# EAGLE board LedShield2b (EAGLE 5.06)
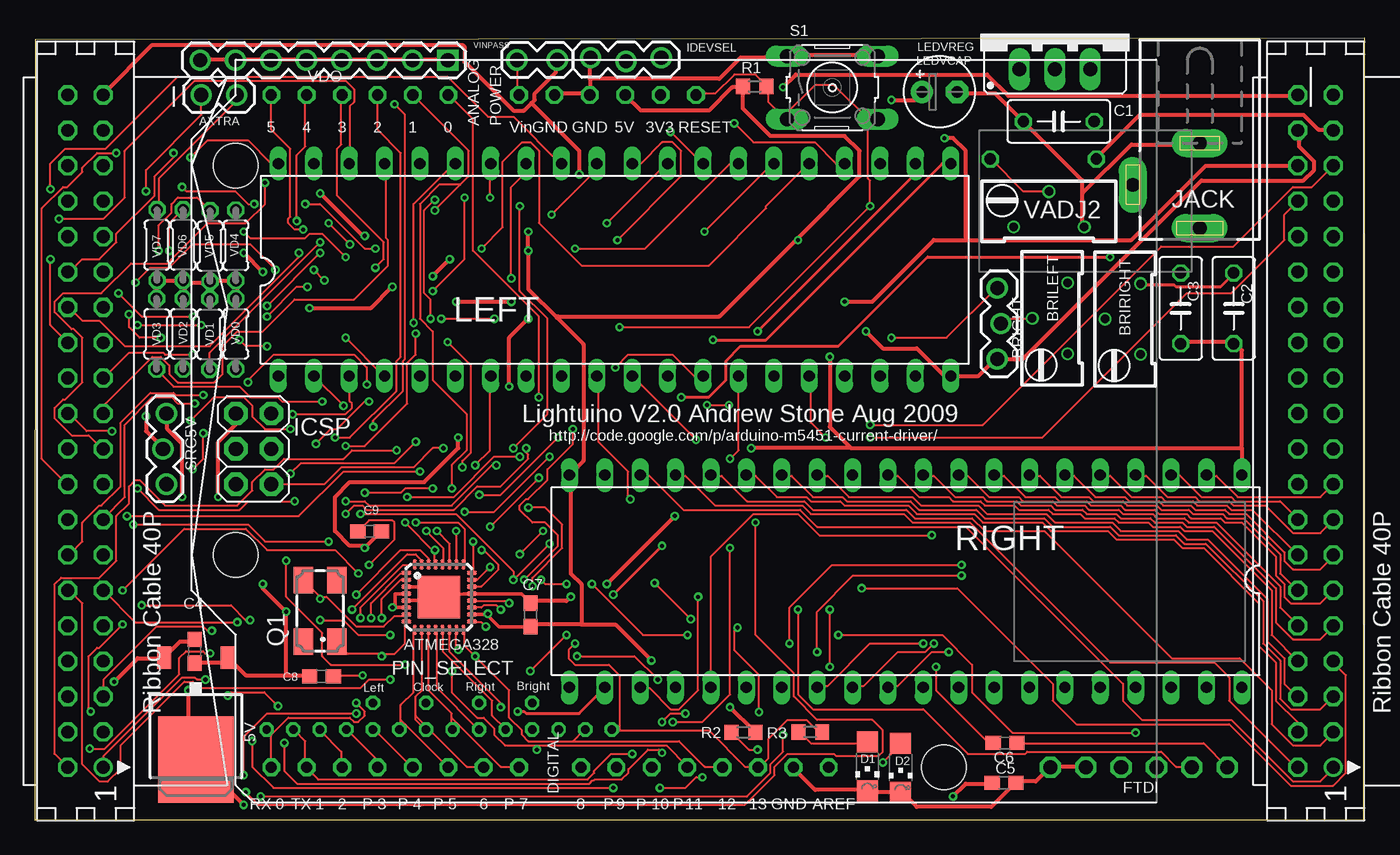
[diagram p0: board, top side]
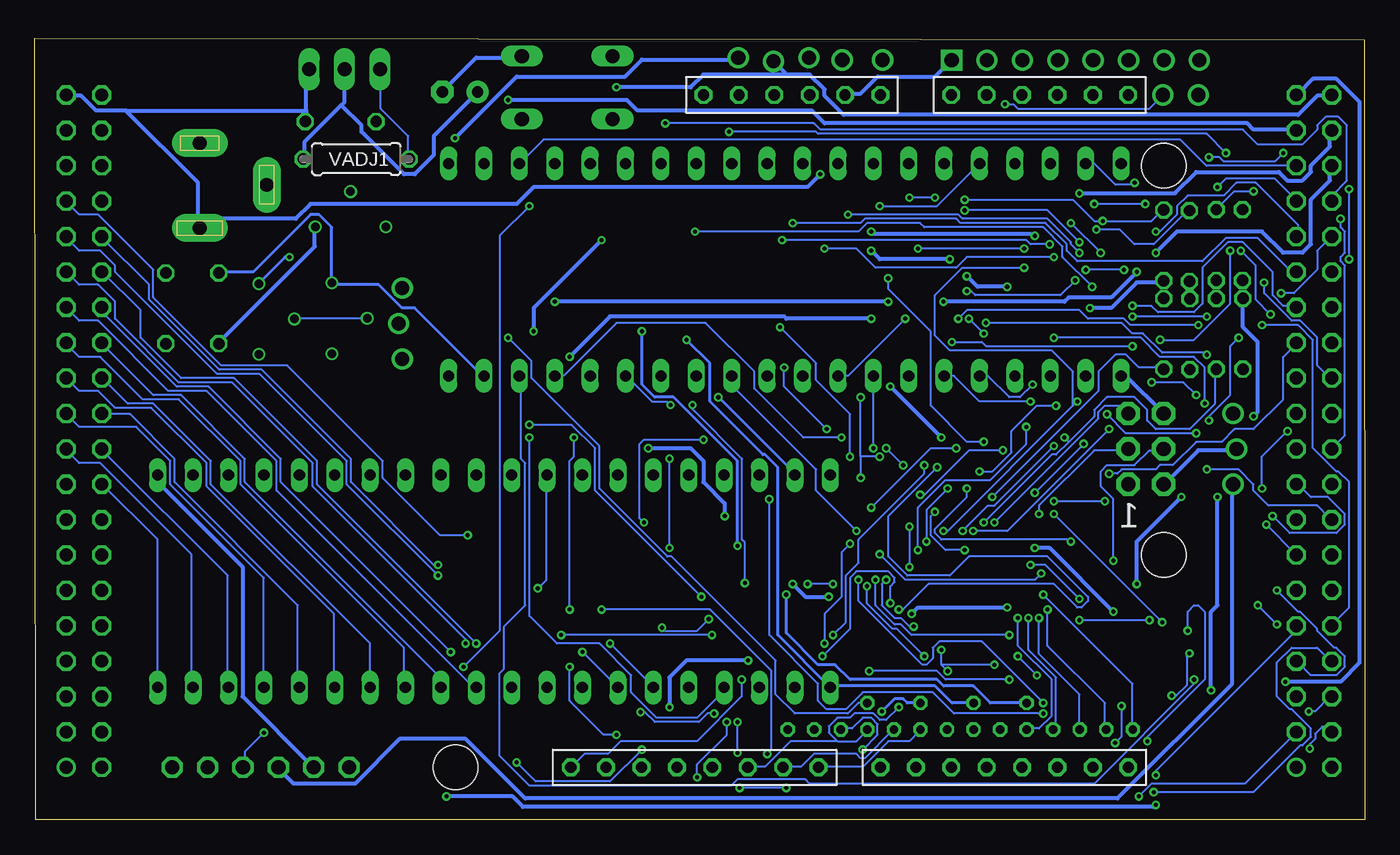
[diagram p1: board, bottom side, seen from below]

Size 95.43 x 56.1 mm. Coordinates in mm from the lower left corner, seen from the top.
Outline: 0,0 95.38,0 95.43,56.1 0.03,55.97 0,0
Copper layers (1*16): Top 0.035mm / dielectric 1.5mm / Bottom 0.035mm
Design rules "default *": minimum track width 6mil, minimum drill 0.3mm, track to track 6mil, track to pad 6mil, pad to pad 6mil, via to via 6mil, smd to smd 6mil, copper to edge 0.15mm, drill to drill 8mil, minimum pad ring 0.15mm, minimum via ring 0.15mm, stop-mask expansion 4mil, vias tented up to drill 0mil, thermal gap 10mil
Net classes: 1 PWR: width 0.305 mm, clearance 0.203 mm; 2 GND: width 0.305 mm, clearance 0.203 mm; 3 CHIPCOM: width 0.203 mm, clearance 0.152 mm; 4 solder: clearance 1.524 mm

## Footprints (pad centres in the part's own frame; a part is rotated, then mirrored left to right if it is on the bottom)
DPACK = smd 1 x 1.6: 1 -2.28,-4.8; 3 2.28,-4.8 | smd 5.4 x 6.2: 2 0,2.5
CON40L = drill 0.914 round: 1 24.13,1.27 | drill 0.914 octagon: 2 24.13,-1.27; 3 21.59,1.27; 4 21.59,-1.27; 5 19.05,1.27; 6 19.05,-1.27; 7 16.51,1.27; 8 16.51,-1.27; 9 13.97,1.27; 10 13.97,-1.27; 11 11.43,1.27; 12 11.43,-1.27; 13 8.89,1.27; 14 8.89,-1.27; 15 6.35,1.27; 16 6.35,-1.27; 17 3.81,1.27; 18 3.81,-1.27; 19 1.27,1.27; 20 1.27,-1.27; 21 -1.27,1.27; 22 -1.27,-1.27; 23 -3.81,1.27; 24 -3.81,-1.27; 25 -6.35,1.27; 26 -6.35,-1.27; 27 -8.89,1.27; 28 -8.89,-1.27; 29 -11.43,1.27; 30 -11.43,-1.27; 31 -13.97,1.27; 32 -13.97,-1.27; 33 -16.51,1.27; 34 -16.51,-1.27; 35 -19.05,1.27; 36 -19.05,-1.27; 37 -21.59,1.27; 38 -21.59,-1.27; 39 -24.13,1.27; 40 -24.13,-1.27
1X02 = drill 1.016 round: 1 0,0; 2 2.54,0
1X03_LOCK = drill 1.016 round: 1 0,0.127; 2 2.54,-0.127; 3 5.08,0.127
RTRIM64Y = drill 0.61 round: 1 0,-2.54; 2 -2.54,0; 3 0,2.54
C050-030X075 = drill 0.813 octagon: 1 -2.54,0; 2 2.54,0
C0603 = smd 1.1 x 1: 1 -0.85,0; 2 0.85,0
MLF32 = smd 0.7 x 0.3: 1 -2.35,1.75; 2 -2.35,1.25; 3 -2.35,0.75; 4 -2.35,0.25; 5 -2.35,-0.25; 6 -2.35,-0.75; 7 -2.35,-1.25; 8 -2.35,-1.75; 17 2.35,-1.75; 18 2.35,-1.25; 19 2.35,-0.75; 20 2.35,-0.25; 21 2.35,0.25; 22 2.35,0.75; 23 2.35,1.25; 24 2.35,1.75 | smd 0.3 x 0.7: 9 -1.75,-2.35; 10 -1.25,-2.35; 11 -0.75,-2.35; 12 -0.25,-2.35; 13 0.25,-2.35; 14 0.75,-2.35; 15 1.25,-2.35; 16 1.75,-2.35; 25 1.75,2.35; 26 1.25,2.35; 27 0.75,2.35; 28 0.25,2.35; 29 -0.25,2.35; 30 -0.75,2.35; 31 -1.25,2.35; 32 -1.75,2.35 | smd 3.048 x 3.048: CENTER 0,0
CHIPLED_1206 = smd 1.5 x 1.5: A 0,-1.75; C 0,1.75
1X06-CLEAN = drill 1.016 octagon: 1 -6.35,0; 2 -3.81,0; 3 -1.27,0; 4 1.27,0; 5 3.81,0; 6 6.35,0
2X03 = drill 1.016 pad 1.676 octagon: 1 -2.54,-1.27; 2 -2.54,1.27; 3 0,-1.27; 4 0,1.27; 5 2.54,-1.27; 6 2.54,1.27
DCJ0202 = drill 1 pad 2 long: 1 0,3.1; 2 4.8,0; 3 0,-3
E2,5-5 = drill 0.813 pad 1.6 round: + -1.27,0 | drill 0.813 pad 1.6 octagon: - 1.27,0
317TS = drill 1.016 long: 1 -2.54,-2.54; 2 0,-2.54; 3 2.54,-2.54
DIL40 = drill 0.813 long: BRIGHTNESS 21.59,-7.62; CLKIN 24.13,7.62; DATAIN 21.59,7.62; GND -24.13,-7.62; OUT01 19.05,-7.62; OUT02 16.51,-7.62; OUT03 13.97,-7.62; OUT04 11.43,-7.62; OUT05 8.89,-7.62; OUT06 6.35,-7.62; OUT07 3.81,-7.62; OUT08 1.27,-7.62; OUT09 -1.27,-7.62; OUT10 -3.81,-7.62; OUT11 -6.35,-7.62; OUT12 -8.89,-7.62; OUT13 -11.43,-7.62; OUT14 -13.97,-7.62; OUT15 -16.51,-7.62; OUT16 -19.05,-7.62; OUT17 -21.59,-7.62; OUT18 -24.13,7.62; OUT19 -21.59,7.62; OUT20 -19.05,7.62; OUT21 -16.51,7.62; OUT22 -13.97,7.62; OUT23 -11.43,7.62; OUT24 -8.89,7.62; OUT25 -6.35,7.62; OUT26 -3.81,7.62; OUT27 -1.27,7.62; OUT28 1.27,7.62; OUT29 3.81,7.62; OUT30 6.35,7.62; OUT31 8.89,7.62; OUT32 11.43,7.62; OUT33 13.97,7.62; OUT34 16.51,7.62; OUT35 19.05,7.62; PWR 24.13,-7.62
CTS406 = smd 1.9 x 1.4: 1 -2.2,-1.2; 2 2.2,-1.2; 3 2.2,1.2; 4 -2.2,1.2
R0603 = smd 1 x 1.1: 1 -0.85,0; 2 0.85,0
B3F-10XX = drill 1.016 long: 1 -3.251,2.261; 2 3.251,2.261; 3 -3.251,-2.261; 4 3.251,-2.261
14TO4A = drill 0.6 pad 1.016 octagon: IN0 -13.335,-1.905; IN1 -11.43,-1.905; IN2 -9.525,-1.905; IN3 -7.62,-1.905; IN4 -5.715,-1.905; IN5 -3.81,-1.905; IN6 -1.905,-1.905; IN7 0,-1.905; IN8 1.905,-1.905; IN9 3.81,-1.905; IN10 5.715,-1.905; IN11 7.62,-1.905; IN12 9.525,-1.905; IN13 11.43,-1.905; OUT0 -1.905,0; OUT1 -5.715,0; OUT2 1.905,0; OUT3 5.715,0
SHIELD-OCTAGONALPAD = drill 0.8 pad 1.27 octagon: 0_RX -25.4,27.94; 1_TX -25.4,25.4; 2 -25.4,22.86; 3 -25.4,20.32; 3V3 22.86,0; 4 -25.4,17.78; 5 -25.4,15.24; 5V 22.86,2.54; 6 -25.4,12.7; 7 -25.4,10.16; 8 -25.4,5.715; 9 -25.4,3.175; 10 -25.4,0.635; 11 -25.4,-1.905; 12 -25.4,-4.445; 13 -25.4,-6.985; A_0 22.86,15.24; A_1 22.86,17.78; A_2 22.86,20.32; A_3 22.86,22.86; A_4 22.86,25.4; A_5 22.86,27.94; AREF -25.4,-12.065; GND0 -25.4,-9.525; GND1 22.86,7.62; GND2 22.86,5.08; RESET 22.86,-2.54; VIN 22.86,10.16 | hole 3.2: 17.78,30.48; -10.16,30.48; -25.4,-20.32
0207/7 = drill 0.813 octagon: 1 -3.81,0; 2 3.81,0
0204/5 = drill 0.813 octagon: 1 -2.54,0; 2 2.54,0
1X08 = drill 1.016 square: 1 0,0 | drill 1.016 round: 2 2.54,0; 3 5.08,0; 4 7.62,0; 5 10.16,0; 6 12.7,0; 7 15.24,0; 8 17.78,0
1X02_LOCK = drill 1.016 round: 1 -0.178,0; 2 2.718,0

## Placement (x,y rotation side)
5V  MC33269D-5.0  [DPACK]  11.56,6.83 180 top
_  [CON40L]  3.63,27.89 270 top
__  [CON40L]  91.9,27.89 270 top
AXTRA  [1X02]  11.94,52.02 0 top
BRIGHT  [1X03_LOCK]  69.19,33.07 90 top
BRILEFT  10k  [RTRIM64Y]  74.12,35.99 0 top
BRIRIGHT  10k  [RTRIM64Y]  79.35,35.94 0 top
C1  .1uF  [C050-030X075]  73.48,50.11 180 top
C2  [C050-030X075]  86.03,36.7 270 top
C3  [C050-030X075]  82.22,36.7 270 top
C4  .1uF  [C0603]  11.46,12.09 270 top
C5  .1uF  [C0603]  69.55,2.64 0 top
C6  0.1uF  [C0603]  69.62,5.51 180 top
C7  .1uF  [C0603]  35.59,14.71 90 top
C8  22pF  [C0603]  20.57,10.29 180 top
C9  22pf  [C0603]  24.03,20.7 0 top
CPU  MEGA48/88/168  [MLF32]  29.01,15.98 0 top
D1  [CHIPLED_1206]  59.74,3.84 180 top
D2  [CHIPLED_1206]  62.13,3.73 180 top
FTDI  [1X06-CLEAN]  79.22,3.76 0 top
ICSP  [2X03]  15.7,26.62 90 top
IDEVSEL  [1X03_LOCK]  39.88,54.56 0 top
JACK  DCJ0202  [DCJ0202]  83.59,45.57 180 top
LEDVCAP  100uF  [E2,5-5]  64.92,52.25 0 top
LEDVREG  [317TS]  73.2,56.41 0 top
LEFT  ST-M5451PDIP40  [DIL40]  41.61,39.47 0 top
Q1  [CTS406]  20.47,14.99 90 top
R1  10K  [R0603]  51.66,52.63 0 top
R2  1.0 K  [R0603]  50.85,6.27 180 top
R3  1.0 K  [R0603]  55.65,6.3 180 top
RIGHT  ST-M5451PDIP40  [DIL40]  62.48,17.12 180 top
S1  RESET  [B3F-10XX]  57.23,52.55 0 top
SRC5V  [1X03_LOCK]  9.32,29.16 270 top
U$1  14TO4  [14TO4A]  29.97,8.38 0 top
U$3  ARDUINO-USBOCTAGONAL_PADS  [SHIELD-OCTAGONALPAD]  44.91,29.16 90 top
VADJ1  [0207/7]  72.36,47.42 0 bottom
VADJ2  [RTRIM64Y]  72.77,42.55 270 top
VD0  [0204/5]  14.43,34.87 270 top
VD1  [0204/5]  12.55,34.85 270 top
VD2  [0204/5]  10.64,34.87 270 top
VD3  [0204/5]  8.74,34.87 270 top
VD4  [0204/5]  14.43,41.22 90 top
VD5  [0204/5]  12.57,41.17 90 top
VD6  [0204/5]  10.64,41.25 90 top
VD7  [0204/5]  8.76,41.25 90 top
VDO  [1X08]  29.64,54.51 180 top
VINPASS  [1X02_LOCK]  34.77,54.53 0 top

## Library data of the parts
5V = linear
_ __ = con-harting
AXTRA BRIGHT IDEVSEL SRC5V VDO VINPASS = SparkFun
BRILEFT BRIRIGHT LEDVCAP R1-R3 VADJ2 VD0 VD1-VD7 = resistor
C1-C9 VADJ1 = rcl
CPU U$1 = ledshield2
D1 D2 = led
FTDI = carduino
ICSP = pinhead-ez
JACK = con-jack
LEDVREG = v-reg
LEFT RIGHT = stone
Q1 = crystal
S1 = switch-omron
U$3 = Arduino-Various

## Nets
3V3: U$3.3V3
+5V [PWR]: _.38 __.38 BRIGHT.1 C7.1 CPU.4 CPU.6 CPU.18 ICSP.2 LEFT.PWR R1.1 R2.1 RIGHT.PWR SRC5V.2 U$3.5V VD0.1 VD1.1 VD2.1 VD3.1 VD4.1 VD5.1 VD6.1 VD7.1
BRISEL0 [CHIPCOM]: BRIRIGHT.3 C2.1 RIGHT.BRIGHTNESS
BRISEL1 [CHIPCOM]: BRILEFT.3 C3.1 LEFT.BRIGHTNESS
CLK [CHIPCOM]: LEFT.CLKIN RIGHT.CLKIN U$1.OUT0
DATA0 [CHIPCOM]: RIGHT.DATAIN U$1.OUT2
DATA1 [CHIPCOM]: LEFT.DATAIN U$1.OUT1
GND [GND]: 5V.1 C1.2 C2.2 C3.2 C4.2 C5.2 C7.2 C8.2 C9.2 CPU.3 CPU.5 CPU.21 CPU.CENTER D1.C D2.C FTDI.1 FTDI.2 ICSP.6 IDEVSEL.1 JACK.3 LEDVCAP.- LEFT.GND RIGHT.GND S1.1 S1.2 U$3.GND0 U$3.GND1 U$3.GND2 VADJ2.3 VDO.1 VDO.2 VDO.3 VDO.4 VDO.5 VDO.6 VDO.7 VDO.8
GND3 [GND]: _.40 __.40 IDEVSEL.2
LEDPWR [PWR]: _.37 __.37 LEDVCAP.+ LEDVREG.2 VADJ1.1
MISO: CPU.16 ICSP.1 U$1.IN12 U$3.12
MOSI: CPU.15 ICSP.4 U$1.IN11 U$3.11
N$1: D1.A R3.2
N$2: BRIGHT.2 BRILEFT.2 BRIRIGHT.2
N$3: AXTRA.1 CPU.19 VD6.2
N$4: U$3.VIN VINPASS.1
N$5: AXTRA.2 CPU.22 VD7.2
N$6: __.1 RIGHT.OUT01
N$7: __.2 RIGHT.OUT02
N$8: __.3 RIGHT.OUT03
N$9: __.4 RIGHT.OUT04
N$10: __.5 RIGHT.OUT05
N$11: __.6 RIGHT.OUT06
N$12: __.7 RIGHT.OUT07
N$13: __.8 RIGHT.OUT08
N$14: __.9 RIGHT.OUT09
N$15: __.10 RIGHT.OUT10
N$17: __.11 RIGHT.OUT11
N$18: __.12 RIGHT.OUT12
N$19: __.13 RIGHT.OUT13
N$20: __.14 RIGHT.OUT14
N$21: __.15 RIGHT.OUT15
N$22: __.16 RIGHT.OUT16
N$23: __.17 RIGHT.OUT17
N$24: __.18 RIGHT.OUT18
N$25: __.19 RIGHT.OUT19
N$26: __.20 RIGHT.OUT20
N$27: __.21 RIGHT.OUT21
N$28: __.22 RIGHT.OUT22
N$29: __.23 RIGHT.OUT23
N$30: __.24 RIGHT.OUT24
N$31: __.25 RIGHT.OUT25
N$32: __.26 RIGHT.OUT26
N$33: __.27 RIGHT.OUT27
N$34: __.28 RIGHT.OUT28
N$35: __.29 RIGHT.OUT29
N$36: __.30 RIGHT.OUT30
N$37: __.31 RIGHT.OUT31
N$38: __.32 RIGHT.OUT32
N$39: __.33 RIGHT.OUT33
N$40: __.34 RIGHT.OUT34
N$41: __.35 RIGHT.OUT35
N$43: CPU.32 U$1.IN2 U$3.2
N$45: _.1 LEFT.OUT01
N$46: _.2 LEFT.OUT02
N$47: _.3 LEFT.OUT03
N$48: _.4 LEFT.OUT04
N$49: CPU.1 U$1.IN3 U$3.3
N$50: _.5 LEFT.OUT05
N$51: _.6 LEFT.OUT06
N$52: _.7 LEFT.OUT07
N$53: _.8 LEFT.OUT08
N$54: _.9 LEFT.OUT09
N$55: _.10 LEFT.OUT10
N$56: _.11 LEFT.OUT11
N$57: _.12 LEFT.OUT12
N$58: _.13 LEFT.OUT13
N$59: _.14 LEFT.OUT14
N$60: _.15 LEFT.OUT15
N$61: _.16 LEFT.OUT16
N$62: _.17 LEFT.OUT17
N$63: _.18 LEFT.OUT18
N$64: _.19 LEFT.OUT19
N$65: _.20 LEFT.OUT20
N$66: _.21 LEFT.OUT21
N$67: _.22 LEFT.OUT22
N$68: _.23 LEFT.OUT23
N$69: _.24 LEFT.OUT24
N$70: _.25 LEFT.OUT25
N$71: _.26 LEFT.OUT26
N$72: _.27 LEFT.OUT27
N$73: _.28 LEFT.OUT28
N$74: _.29 LEFT.OUT29
N$75: _.30 LEFT.OUT30
N$76: _.31 LEFT.OUT31
N$77: _.32 LEFT.OUT32
N$78: _.33 LEFT.OUT33
N$79: _.34 LEFT.OUT34
N$80: CPU.2 U$1.IN4 U$3.4
N$81: CPU.9 U$1.IN5 U$3.5
N$82: CPU.10 U$1.IN6 U$3.6
N$83: CPU.11 U$1.IN7 U$3.7
N$84: CPU.12 U$1.IN8 U$3.8
N$85: CPU.13 U$1.IN9 U$3.9
N$86: CPU.14 U$1.IN10 U$3.10
N$90: BRIGHT.3 U$1.OUT3
N$91: D2.A R2.2
N$92: LEDVREG.1 VADJ1.2 VADJ2.2
N$93: _.35 LEFT.OUT35
N$94: C9.1 CPU.7 Q1.3
N$95: C8.1 CPU.8 Q1.1
N$97: CPU.23 U$3.A_0 VD0.2
N$98: CPU.24 U$3.A_1 VD1.2
N$99: CPU.25 U$3.A_2 VD2.2
N$100: CPU.26 U$3.A_3 VD3.2
N$101: CPU.27 U$3.A_4 VD4.2
N$102: CPU.28 U$3.A_5 VD5.2
N$105: CPU.20 U$3.AREF
PWR5PRESEL [PWR]: 5V.2 C5.1 SRC5V.1
PWRNET [PWR]: 5V.3 _.39 __.39 C1.1 C4.1 JACK.1 LEDVREG.3 VINPASS.2
RST: C6.2 CPU.29 ICSP.5 R1.2 S1.3 S1.4 U$3.RESET
RTS#: C6.1 FTDI.6
RXD: CPU.30 FTDI.4 U$1.IN0 U$3.0_RX
SCK: CPU.17 ICSP.3 R3.1 U$1.IN13 U$3.13
TXD: CPU.31 FTDI.5 U$1.IN1 U$3.1_TX
USB_5V [PWR]: FTDI.3 SRC5V.3
USRPWR [PWR]: _.36 __.36 IDEVSEL.3

## Tracks (layer width: path | path; a pad name or v marks a point on that pad's centre or on a via)
+5V  (via drill 0.3)
  Top 0.254: CPU.18 32.42,14.73 32.44,14.71 33.3,13.84 35.57,13.84 C7.1 | CPU.4 25.86,16.23 25.86,15.23 CPU.6
  Top 0.305: __.38 90.73,49.38 90.73,48.31 91.8,47.24 91.8,46.63 91.03,45.87 83.72,45.87 70.92,33.07 BRIGHT.1 68.94,33.07 67.72,31.85 LEFT.PWR 65.28,31.85 63.3,33.83 60.86,33.83 v59.64,35.05 | VD1.1 12.55,38.56 VD5.1 | VD0.1 14.53,37.49 14.53,38.56 VD4.1 14.38,38.71 12.7,38.71 VD5.1 | 10.72,38.56 10.72,38.71 VD6.1 | 10.72,38.56 10.72,37.49 VD2.1 | VD3.1 8.74,38.71 VD7.1 VD6.1 | 10.72,38.56 12.4,38.56 VD5.1 | VD6.1 10.72,38.56 | v7.98,28.96 7.98,27.89 9.2,26.67 SRC5V.2 | U$3.5V 43.49,50.9 48.36,50.9 50.04,52.58 50.8,52.58 R1.1 50.8,52.43 50.8,51.05 52.78,49.07 58.12,49.07 59.18,48.01 59.18,46.18 54.69,41.68 | v49.89,8.08 51.56,6.4 R2.1 | v44.25,11.43 41.66,14.02 39.22,14.02 | 39.22,14.02 35.87,14.02 35.71,13.87 C7.1 | v25.65,15.24 25.81,15.24 25.86,15.23 | 32.44,14.71 v32.51,14.78 | 39.22,14.02 39.22,16.92 38.46,17.68 38.46,24.69 RIGHT.PWR 39.37,25.76 39.37,34.14 37.47,36.04 | v20.47,44.96 23.52,41.91 v23.67,41.91 | v35.41,42.22 v35.41,40.84 35.41,38.1 37.47,36.04 | 54.69,41.68 49.12,36.12 37.54,36.12 37.47,36.04 | v19.71,36.73 24.13,36.73 v25.65,38.25 | v28.55,39.01 v29.77,40.23 | 54.69,41.68 v54.76,41.61
  Bottom 0.305: SRC5V.2 9.2,26.52 11.94,26.52 14.38,24.08 ICSP.2 | v7.98,28.96 7.67,29.26 7.67,34.29 8.74,35.36 VD3.1 | v49.89,8.08 49.89,10.21 48.67,11.43 v44.25,11.43 | v25.65,15.24 32.06,15.24 v32.51,14.78 | v20.47,44.96 13.61,44.96 12.09,46.48 6.15,46.48 5.54,45.87 4.47,45.87 3.86,46.48 3.86,46.94 2.49,48.31 2.49,49.38 _.38 | v23.67,41.91 23.83,41.91 23.98,42.06 35.26,42.06 v35.41,42.22 | v19.71,36.73 18.19,36.73 16.36,38.56 14.53,38.56 VD4.1 | v25.65,38.25 27.79,38.25 v28.55,39.01 | v29.77,40.23 34.8,40.23 v35.41,40.84 | v59.64,35.05 59.64,36.73 v54.76,41.61
BRISEL0  (via drill 0.3)
  Top 0.203: BRIRIGHT.3 79.45,38.41 81.74,38.41 81.89,38.25 85.09,38.25 86,39.17 C2.1 | v46.38,30.33 48.36,30.33 49.58,31.55 49.58,32.92 50.65,33.99 57.66,33.99 64.06,40.39 v77.17,40.39
  Bottom 0.203: v46.38,30.33 40.89,24.84 RIGHT.BRIGHTNESS | v77.17,40.39 77.47,40.39 79.3,38.56 BRIRIGHT.3
BRISEL1
  Bottom 0.203: LEFT.BRIGHTNESS 63.3,31.85 68.17,36.73 69.09,36.73 70.76,38.41 74.12,38.41 BRILEFT.3 74.12,42.52 75.03,43.43 75.64,43.43 79.76,39.32 82.19,39.32 C3.1
CLK  (via drill 0.3)
  Top 0.203: LEFT.CLKIN 65.13,47.09 52.48,34.44 v48.67,34.44
  Bottom 0.203: U$1.OUT0 29.62,8.38 30.84,9.6 38.3,9.6 RIGHT.CLKIN 42.11,13.26 42.11,25.3 43.03,26.21 43.18,26.21 46.99,30.02 46.99,32.77 v48.67,34.44
DATA0  (via drill 0.3)
  Top 0.203: v34.65,7.77 35.1,7.77 35.26,7.62 39.07,7.62 40.89,9.45 RIGHT.DATAIN
  Bottom 0.203: v34.65,7.77 33.73,8.69 33.12,8.69 32.82,8.38 U$1.OUT2
DATA1  (via drill 0.3)
  Top 0.203: v41.5,16.15 v45.01,19.66 | v51.87,35.05 63.14,46.33 63.14,47.09 LEFT.DATAIN
  Bottom 0.203: v41.5,16.15 41.5,13.41 39.22,11.13 38,11.13 36.93,10.06 30.68,10.06 30.23,9.6 28.09,9.6 26.87,8.38 U$1.OUT1 | v45.01,19.66 45.01,25.76 49.58,30.33 50.95,30.33 51.87,31.24 v51.87,35.05
GND  (via drill 0.3)
  Top 0.254: C7.2 34.92,16.23 CPU.21 arc12 CPU.CENTER | CPU.3 28.26,16.73 arc-90 CPU.CENTER | CPU.5 28.76,15.73 arc90 CPU.CENTER
  Top 0.305: VDO.8 11.94,54.56 14.38,54.56 VDO.7 14.53,54.56 16.82,54.56 VDO.6 16.97,54.56 19.41,54.56 VDO.5 19.56,54.56 22,54.56 VDO.4 22.15,54.56 24.44,54.56 VDO.3 24.59,54.56 27.03,54.56 VDO.2 27.18,54.56 29.62,54.56 VDO.1 | 39.83,52.12 37.39,52.12 U$3.GND1 | 39.83,53.19 39.83,52.12 | 39.83,53.19 39.83,54.56 IDEVSEL.1 | 39.83,52.12 U$3.GND2 | S1.2 60.4,54.86 54,54.86 S1.1 53.85,54.71 50.65,54.71 49.12,53.19 39.83,53.19 | 75.18,44.96 75.18,45.87 C1.2 68.94,52.12 66.19,52.12 LEDVCAP.- | 75.18,44.96 75.18,42.67 VADJ2.3 | 75.18,44.96 78.69,48.46 83.57,48.46 JACK.3 | 18.03,10.36 15.14,10.36 13.92,11.58 5V.1 14.07,11.28 11.48,11.28 C4.2 | 18.03,10.36 19.71,10.36 C8.2 | 18.03,10.36 v18.03,14.94 16.36,16.61 v16.36,16.92 | C9.2 24.74,20.57 v23.67,19.51 23.67,19.66 22.61,19.66 21.54,20.73 21.54,23.17 22.61,24.23 27.94,24.23 30.38,26.67 v30.38,27.43 | v13.16,23.17 13.16,27.13 14.38,28.35 14.38,29.11 ICSP.6 | FTDI.2 75.34,3.81 72.9,3.81 FTDI.1 72.75,3.66 71.83,2.74 70.46,2.74 C5.2 70.31,2.59 68.63,0.91 63.3,0.91 62.23,1.98 D2.C 62.08,1.98 59.79,1.98 D1.C 59.64,2.13 55.98,2.13 54.46,3.66 U$3.GND0 | C3.2 82.35,34.29 86,34.29 C2.2 86.16,34.14 86.61,33.68 86.61,26.67 | 86.61,26.67 RIGHT.GND | v38.46,16 38.15,15.7 35.71,15.7 C7.2 | v45.92,21.79 v41.05,16.92 | 58.57,26.67 86.61,26.67 | 58.57,26.67 v51.41,26.67 | v34.04,31.09 34.04,34.6 v35.41,35.97 | v57.05,33.22 57.05,28.19 58.57,26.67
  Bottom 0.305: U$3.GND1 37.24,52.12 36.17,52.12 34.95,53.34 30.84,53.34 29.77,54.41 VDO.1 | S1.2 60.55,54.71 63.75,54.71 66.19,52.27 LEDVCAP.- | LEFT.GND 17.12,31.85 ICSP.6 | v23.67,19.51 22.61,19.51 v18.03,14.94 | v13.16,23.17 16.36,19.96 v16.36,16.92 | v38.46,16 40.13,16 v41.05,16.92 | v45.92,21.79 45.92,22.71 47.45,24.23 47.45,25.76 48.36,26.67 v51.41,26.67 | FTDI.2 75.49,3.81 80.52,8.84 80.52,18.14 86.61,24.23 RIGHT.GND | v30.38,27.43 v34.04,31.09 | v35.41,35.97 41.5,35.97 41.66,36.12 54.15,36.12 v57.05,33.22 | VADJ2.3 75.34,42.52 75.34,41.15 82.19,34.29 C3.2
GND3  (via drill 0.3)
  Top 0.305: v53.7,52.58 54.61,53.49 68.33,53.49 69.85,51.97 90.58,51.97 __.40
  Bottom 0.305: 41.58,53.57 42.42,54.41 IDEVSEL.2 | 41.58,53.57 41.5,53.49 39.83,53.49 38.76,52.43 38.76,51.97 37.39,50.6 4.78,50.6 3.4,51.97 2.49,51.97 _.40 | v53.7,52.58 48.36,52.58 47.45,53.49 41.66,53.49 41.58,53.57
LEDPWR  (via drill 0.3)
  Top 0.305: __.37 93.17,49.53 92.1,49.53 91.03,50.6 79.3,50.6 76.25,47.55 VADJ1.1 | v61.47,51.66 63.14,51.66 63.6,52.12 LEDVCAP.+
  Bottom 0.305: 73.43,51.28 73.2,51.51 LEDVREG.2 | 73.43,51.28 76.1,48.62 76.1,47.55 VADJ1.1 | v61.47,51.66 52.93,51.66 52.17,50.9 39.68,50.9 38.76,49.99 8.43,49.99 7.98,49.53 4.93,49.53 _.37 | 73.43,51.28 71.98,49.84 71.98,49.38 68.94,46.33 68.17,46.33 66.8,47.7 66.8,49.07 63.75,52.12 LEDVCAP.+
MISO  (via drill 0.3)
  Top 0.152: 38.61,5.64 35.41,5.64 34.95,6.1 34.95,6.4 34.04,7.32 34.04,9.3 v31.6,11.74 30.84,12.5 30.84,13.56 CPU.16 | 38.61,5.64 39.37,6.4 U$1.IN12 | 38.61,5.64 46.23,5.64 48.06,3.81 49.28,3.81 U$3.12 | ICSP.1 20.78,24.08 22,25.3 27.18,25.3 28.55,26.67 v29.31,26.67 | v35.41,22.4 36.63,22.4 37.85,21.18 37.85,19.51 35.71,17.37 v35.71,16.76
  Bottom 0.152: v29.31,26.67 31.14,26.67 v35.41,22.4 | v35.71,16.76 35.71,15.55 33.88,13.72 33.58,13.72 v31.6,11.74
MOSI  (via drill 0.3)
  Top 0.152: v30.38,12.19 30.23,12.34 30.23,13.56 CPU.15 | v29.92,10.67 29.92,9.14 31.75,7.32 32.21,7.32 32.97,6.55 32.97,6.1 33.73,5.33 36.02,5.33 | 36.02,5.33 45.31,5.33 46.84,3.81 U$3.11 | 36.02,5.33 v36.02,5.03 | v18.03,18.59 18.03,16 20.63,13.41 20.63,11.74 21.23,11.13 v26.57,11.13
  Bottom 0.152: 30.38,11.13 v30.38,12.19 | 30.38,11.13 v29.92,10.67 | v36.02,5.03 34.95,6.1 34.95,6.86 35.41,7.32 36.02,7.32 36.78,6.55 37.54,6.55 U$1.IN11 | v18.03,18.59 18.03,23.01 18.95,23.93 18.95,24.99 18.49,25.45 16.51,25.45 15.44,26.52 14.53,26.52 ICSP.4 | v26.57,11.13 30.38,11.13
N$1
  Top 0.152: R3.2 54.92,6.25 55.68,5.49 59.64,5.49 D1.A
N$2
  Top 0.152: BRILEFT.2 71.53,35.97 69.7,35.97 69.39,35.66 BRIGHT.2
  Bottom 0.152: BRIRIGHT.2 76.71,35.97 71.68,35.97 BRILEFT.2
N$3  (via drill 0.3)
  Top 0.152: v33.43,15.09 33.12,15.39 32.21,15.39 32.06,15.24 31.45,15.24 CPU.19 | v30.68,25.3 30.68,25.76 31.29,26.37 31.29,32.61 v29.62,34.29 | v16.66,33.99 15.14,33.99 v14.68,34.44 | v9.65,40.84 9.65,42.82 10.57,43.74 VD6.2 | v7.98,45.11 7.98,46.63 11.94,50.6 AXTRA.1
  Bottom 0.152: v33.43,15.09 33.12,15.09 31.29,16.92 22.3,16.92 20.63,15.24 20.32,15.24 19.86,15.7 19.86,16 22.76,18.9 28.4,18.9 29.77,17.53 32.82,17.53 34.19,18.9 34.19,21.79 v30.68,25.3 | v29.62,34.29 27.48,34.29 27.18,33.99 v16.66,33.99 | v14.68,34.44 12.24,34.44 9.65,37.03 v9.65,40.84 | v7.98,45.11 9.35,45.11 10.57,43.89 VD6.2
N$4
  Top 0.152: U$3.VIN 34.65,52.12 34.65,54.41 VINPASS.1
N$5  (via drill 0.3)
  Top 0.152: v32.06,19.36 32.21,19.36 33.27,18.29 33.27,17.98 32.06,16.76 31.45,16.76 CPU.22 | v24.28,28.19 24.28,28.65 26.42,30.79 26.42,32.92 26.57,33.07 26.57,50.6 v25.81,51.36 | VD7.2 8.89,43.89 8.89,46.03 14.38,51.51 14.38,51.97 AXTRA.2
  Bottom 0.152: v32.06,19.36 32.06,22.4 30.07,24.38 26.87,24.38 24.28,26.98 v24.28,28.19 | v25.81,51.36 25.2,51.36 24.89,51.05 15.44,51.05 AXTRA.2
N$6
  Top 0.152: RIGHT.OUT01 43.49,24.69 44.09,24.69 46.53,22.25 54.92,22.25 56.13,21.03 66.8,21.03 78.08,9.75 78.08,8.53 79.45,7.16 85.85,7.16 90.27,2.74 92.25,2.74 93.17,3.66 __.1
N$7
  Top 0.152: RIGHT.OUT02 46.08,24.69 46.69,24.69 48.82,22.56 55.07,22.56 55.68,21.95 62.38,21.95 62.99,21.34 67.11,21.34 77.17,11.28 84.63,11.28 85.7,10.21 85.7,8.53 90.58,3.66 __.2
N$8
  Top 0.152: RIGHT.OUT03 48.51,24.69 49.28,24.69 51.11,22.86 55.22,22.86 55.83,22.25 62.54,22.25 63.14,21.64 67.26,21.64 68.17,20.73 72.44,20.73 81.59,11.58 86.46,11.58 88.75,9.3 88.75,6.86 90.27,5.33 92.25,5.33 93.17,6.25 __.3
N$9
  Top 0.152: RIGHT.OUT04 51.11,24.69 51.71,24.69 53.24,23.17 55.37,23.17 55.68,22.86 57.81,22.86 58.12,22.56 62.69,22.56 63.3,21.95 67.41,21.95 68.02,21.34 72.29,21.34 72.9,20.73 77.01,20.73 77.62,20.12 81.74,20.12 82.35,19.51 83.87,19.51 87.83,15.55 87.83,12.5 89.05,11.28 89.05,8.53 90.58,7.01 90.58,6.4 __.4
N$10
  Top 0.152: __.5 92.25,7.93 90.12,7.93 89.36,8.69 89.36,11.43 88.14,12.65 88.14,15.7 84.02,19.81 82.5,19.81 81.89,20.42 77.78,20.42 77.17,21.03 73.05,21.03 72.44,21.64 68.17,21.64 67.56,22.25 63.45,22.25 62.84,22.86 58.27,22.86 57.96,23.17 55.83,23.17 54.31,24.69 53.7,24.69 RIGHT.OUT05
N$11
  Top 0.152: RIGHT.OUT06 56.13,24.69 56.9,24.69 58.42,23.17 62.99,23.17 63.6,22.56 67.72,22.56 68.33,21.95 72.59,21.95 73.2,21.34 77.32,21.34 77.93,20.73 82.04,20.73 82.65,20.12 84.18,20.12 88.44,15.85 88.44,12.8 89.66,11.58 89.66,9.75 90.58,8.84 __.6
N$12  (via drill 0.3)
  Top 0.152: v59.33,16.61 66.19,16.61 73.05,9.75 73.05,8.53 74.73,6.86 85.7,6.86 90.12,2.44 93.17,2.44 94.08,3.35 94.08,10.36 93.17,11.28 __.7
  Bottom 0.152: v59.33,16.61 58.73,17.22 58.73,24.69 RIGHT.OUT07
N$13
  Top 0.152: RIGHT.OUT08 61.32,24.69 61.93,24.69 63.45,23.17 65.58,23.17 65.89,22.86 67.87,22.86 68.17,22.56 70.31,22.56 70.61,22.25 72.75,22.25 73.05,21.95 75.03,21.95 75.34,21.64 77.47,21.64 77.78,21.34 79.91,21.34 80.21,21.03 82.19,21.03 82.5,20.73 84.48,20.73 88.75,16.46 88.75,13.26 __.8
N$14
  Top 0.152: RIGHT.OUT09 63.75,24.69 64.52,24.69 66.04,23.17 68.02,23.17 68.33,22.86 70.46,22.86 70.76,22.56 72.9,22.56 73.2,22.25 75.18,22.25 75.49,21.95 77.62,21.95 77.93,21.64 80.06,21.64 80.37,21.34 82.35,21.34 82.65,21.03 84.63,21.03 89.05,16.61 89.05,14.17 90.27,12.95 92.25,12.95 93.17,13.87 __.9
N$15
  Top 0.152: RIGHT.OUT10 66.35,24.69 66.95,24.69 68.48,23.17 70.61,23.17 70.92,22.86 73.05,22.86 73.36,22.56 75.34,22.56 75.64,22.25 77.78,22.25 78.08,21.95 80.21,21.95 80.52,21.64 82.5,21.64 82.8,21.34 84.79,21.34 89.36,16.76 89.36,15.24 90.58,14.02 __.10
N$17
  Top 0.152: __.11 92.25,15.55 90.12,15.55 89.66,16 89.66,16.92 89.05,17.53 89.05,18.9 86.61,21.34 85.4,21.34 85.09,21.64 82.96,21.64 82.65,21.95 80.67,21.95 80.37,22.25 78.23,22.25 77.93,22.56 75.79,22.56 75.49,22.86 73.51,22.86 73.2,23.17 71.07,23.17 69.55,24.69 68.94,24.69 RIGHT.OUT11
N$18
  Top 0.152: RIGHT.OUT12 71.37,24.69 72.14,24.69 73.66,23.17 75.64,23.17 75.95,22.86 78.08,22.86 78.38,22.56 80.52,22.56 80.82,22.25 82.8,22.25 83.11,21.95 85.24,21.95 85.55,21.64 86.77,21.64 89.36,19.05 89.36,17.68 90.58,16.46 __.12
N$19
  Top 0.152: RIGHT.OUT13 73.97,24.69 74.57,24.69 76.1,23.17 78.23,23.17 78.54,22.86 80.67,22.86 80.98,22.56 82.96,22.56 83.26,22.25 85.4,22.25 85.7,21.95 86.92,21.95 89.66,19.2 89.66,18.59 90.27,17.98 92.25,17.98 93.17,18.9 __.13
N$20
  Top 0.152: RIGHT.OUT14 76.56,24.69 77.17,24.69 78.69,23.17 80.82,23.17 81.13,22.86 83.11,22.86 83.41,22.56 85.55,22.56 85.85,22.25 87.38,22.25 __.14
N$21
  Top 0.152: RIGHT.OUT15 78.99,24.69 79.76,24.69 81.28,23.17 83.26,23.17 83.57,22.86 85.7,22.86 86,22.56 88.29,22.56 90.27,20.57 92.25,20.57 93.17,21.49 __.15
N$22
  Top 0.152: RIGHT.OUT16 81.59,24.69 82.19,24.69 83.72,23.17 85.85,23.17 86.16,22.86 89.36,22.86 90.58,21.64 __.16
N$23
  Top 0.152: __.17 92.25,23.17 86.31,23.17 84.79,24.69 84.18,24.69 RIGHT.OUT17
N$24
  Bottom 0.152: RIGHT.OUT18 86.61,20.12 90.58,24.08 __.18
N$25
  Bottom 0.152: RIGHT.OUT19 84.18,9.6 84.18,19.05 90.73,25.6 92.25,25.6 93.17,26.52 __.19
N$26
  Bottom 0.152: RIGHT.OUT20 81.59,9.6 81.59,17.53 90.58,26.52 __.20
N$27
  Bottom 0.152: RIGHT.OUT21 78.99,17.37 85.7,24.08 85.7,25.76 88.14,28.19 92.25,28.19 93.17,29.11 __.21
N$28
  Bottom 0.152: RIGHT.OUT22 76.56,9.6 76.56,15.39 85.4,24.23 85.4,25.91 88.6,29.11 90.58,29.11 __.22
N$29
  Bottom 0.152: __.23 92.25,30.79 90.88,30.79 89.66,29.57 87.07,29.57 83.11,25.6 83.11,23.93 73.97,14.78 73.97,9.6 RIGHT.OUT23
N$30
  Bottom 0.152: RIGHT.OUT24 71.37,12.65 82.8,24.08 82.8,25.76 86.92,29.87 88.75,29.87 90.58,31.7 __.24
N$31
  Bottom 0.152: RIGHT.OUT25 68.94,9.6 68.94,12.34 80.67,24.08 80.67,25.76 85.09,30.18 87.68,30.18 90.73,33.22 92.25,33.22 93.17,34.14 __.25
N$32
  Bottom 0.152: RIGHT.OUT26 66.35,9.6 66.35,10.21 80.37,24.23 80.37,25.91 84.94,30.48 86.92,30.48 90.58,34.14 __.26
N$33
  Bottom 0.152: RIGHT.OUT27 63.75,9.6 64.06,9.6 78.08,23.62 78.08,25.76 83.11,30.79 85.85,30.79 90.88,35.81 92.25,35.81 93.17,36.73 __.27
N$34  (via drill 0.3)
  Top 0.152: v65.58,12.04 64.36,12.04 61.93,9.6 61.32,9.6 RIGHT.OUT28
  Bottom 0.152: v65.58,12.04 77.78,24.23 77.78,25.91 82.96,31.09 85.24,31.09 90.58,36.42 90.58,36.73 __.28
N$35  (via drill 0.3)
  Top 0.152: v64.52,12.65 63.91,12.04 61.93,12.04 59.49,9.6 58.73,9.6 RIGHT.OUT29
  Bottom 0.152: v64.52,12.65 64.52,12.95 75.49,23.93 75.49,25.6 81.28,31.39 85.09,31.39 89.66,35.97 89.66,37.19 90.88,38.41 92.25,38.41 __.29
N$36  (via drill 0.3)
  Top 0.152: v63.75,12.65 59.94,12.65 56.9,9.6 56.13,9.6 RIGHT.OUT30
  Bottom 0.152: v63.75,12.65 75.18,24.08 75.18,25.76 81.13,31.7 84.94,31.7 87.83,34.6 87.83,36.58 90.58,39.32 __.30
N$37  (via drill 0.3)
  Top 0.152: v56.13,12.04 56.13,14.94 58.73,17.53 v66.5,17.53
  Bottom 0.152: v66.5,17.53 73.05,24.08 73.05,25.76 79.3,32 82.35,32 89.66,39.32 89.66,39.78 90.73,40.84 92.25,40.84 93.17,41.76 __.31 | RIGHT.OUT31 v56.13,12.04
N$38  (via drill 0.3)
  Top 0.152: v54.15,12.65 54.15,15.24 57.2,18.29 v66.5,18.29
  Bottom 0.152: v54.15,12.65 51.11,9.6 RIGHT.OUT32 | v66.5,18.29 66.8,18.29 72.75,24.23 72.75,25.91 79.15,32.31 82.19,32.31 87.22,37.34 87.22,38.41 90.58,41.76 __.32
N$39  (via drill 0.3)
  Top 0.152: v64.36,20.42 56.29,20.42 54.76,21.95 51.56,21.95 48.51,18.9 RIGHT.OUT33
  Bottom 0.152: v64.36,20.42 66.35,20.42 70.46,24.54 70.46,25.76 77.32,32.61 82.04,32.61 86.92,37.49 86.92,39.47 90.88,43.43 92.25,43.43 93.17,44.35 __.33
N$40  (via drill 0.3)
  Top 0.152: v59.94,27.43 72.29,27.43 82.65,37.8 85.85,37.8 89.66,41.61 89.66,43.43 __.34
  Bottom 0.152: v59.94,27.43 59.94,14.63 57.96,12.65 54.92,12.65 52.63,10.36 52.63,9.14 50.8,7.32 47.9,7.32 46.08,9.14 46.08,9.45 RIGHT.OUT34
N$41  (via drill 0.3)
  Top 0.152: v47.6,16 47.6,9.3 46.23,7.93 45.62,7.93 44.09,9.45 43.49,9.45 RIGHT.OUT35 | v59.94,28.35 68.02,28.35 80.82,41.15 86,41.15 90.27,45.42 91.64,45.42 __.35
  Bottom 0.152: v47.6,16 55.22,23.62 55.22,26.67 56.9,28.35 v59.94,28.35
N$43  (via drill 0.3)
  Top 0.152: v23.37,14.48 23.37,15.24 26.42,18.29 27.18,18.29 CPU.32 | U$3.2 22,3.81 22,4.88 20.47,6.4 U$1.IN2
  Bottom 0.152: v23.37,14.48 23.37,11.89 20.47,8.99 20.47,6.55 U$1.IN2
N$45  (via drill 0.3)
  Top 0.152: v12.24,10.06 11.63,10.06 11.48,10.21 10.57,10.21 4.93,4.57 4.93,3.81 _.1
  Bottom 0.152: v12.24,10.06 12.24,9.75 19.41,2.59 39.83,2.59 40.13,2.9 45.01,2.9 45.47,2.44 59.94,2.44 62.08,4.57 62.08,10.52 61.77,10.82 61.77,13.87 60.25,15.39 60.25,25.6 60.55,25.91 60.55,31.85 LEFT.OUT01
N$46  (via drill 0.3)
  Top 0.152: v37.54,27.43 33.43,23.32 v31.9,23.32 | v25.96,26.52 22.76,26.52 22.15,25.91 17.88,25.91 17.12,25.15 16.51,25.15 15.6,24.23 15.6,23.62 14.53,22.56 9.35,22.56 7.52,24.38 7.21,24.38 6.76,23.93 6.76,22.71 5.84,21.79 5.84,18.59 4.62,17.37 1.88,17.37 1.42,16.92 1.42,4.72 2.34,3.81 _.2
  Bottom 0.152: LEFT.OUT02 57.51,31.85 53.7,35.66 47.3,35.66 43.79,32.16 43.79,30.94 40.28,27.43 v37.54,27.43 | v31.9,23.32 31.6,23.32 28.4,26.52 v25.96,26.52
N$47  (via drill 0.3)
  Top 0.152: v56.74,27.43 55.68,28.5 55.68,31.85 LEFT.OUT03 | v57.05,10.97 v57.05,15.09 | v53.7,6.1 53.7,4.88 52.78,3.96 52.78,3.35 51.11,1.68 v16.21,1.68
  Bottom 0.152: v56.74,27.43 56.74,26.06 57.05,25.76 v57.05,15.09 | v57.05,10.97 57.05,8.53 54.61,6.1 v53.7,6.1 | v16.21,1.68 15.29,2.59 8.59,2.59 4.93,6.25 _.3
N$48  (via drill 0.3)
  Top 0.152: v48.23,29.77 v49.81,29.77 | v47.07,14.4 v44.48,16.99 | v50.42,13.79 50.19,13.56 50.19,12.17 51.97,10.39 v51.97,7.72 | v46.69,7.62 45.62,7.62 v45.01,7.01 | v45.01,4.8 44.78,5.03 43.99,5.03 42.6,3.63 42.6,3.38 42.11,2.9 40.18,2.9 40.11,2.82 40.03,2.82 39.8,2.59 18.82,2.59 17.91,3.51 v17.91,5.51 | v17.45,8.15 16.46,9.14 14.07,9.14 v13.84,8.92 | v12.57,11.94 12.22,11.94 12.07,12.09 10.85,12.09 10.36,11.61 10.36,10.44 5.03,5.11 v3.94,5.11
  Bottom 0.152: _.4 2.74,6.68 3.05,6.68 3.56,6.17 3.56,5.82 3.91,5.46 3.91,5.33 3.94,5.31 v3.94,5.11 | LEFT.OUT04 52.96,31.85 51.11,30 50.04,30 v49.81,29.77 | v48.23,29.77 48.23,29.46 44.68,25.91 44.68,20.09 44.48,19.89 v44.48,16.99 | v47.07,14.4 47.9,13.56 50.19,13.56 v50.42,13.79 | v51.97,7.72 51.64,7.72 50.93,7.01 47.78,7.01 47.17,7.62 v46.69,7.62 | v45.01,4.8 v45.01,7.01 | v17.91,5.51 17.45,5.97 v17.45,8.15 | v13.84,8.92 13.51,8.92 12.78,9.65 12.78,11.74 v12.57,11.94
N$49  (via drill 0.3)
  Top 0.152: v24.13,14.48 24.13,15.55 26.26,17.68 26.57,17.68 CPU.1 | U$3.3 24.59,4.27 22.45,6.4 U$1.IN3
  Bottom 0.152: v24.13,14.48 24.13,12.19 22.15,10.21 22.15,6.71 22.3,6.55 U$1.IN3
N$50  (via drill 0.3)
  Top 0.152: LEFT.OUT05 50.5,26.52 v49.89,25.91 | v49.89,19.51 49.89,8.99 47.9,7.01 v45.77,7.01 | v47.9,3.05 47.45,3.05 46.69,2.29 v44.86,2.29 | v41.5,2.29 17.12,2.29 15.6,3.81 v15.6,5.64 | v12.7,13.56 12.4,13.56 12.09,13.87 8.74,13.87 4.93,10.06 4.93,8.84 _.5
  Bottom 0.152: v49.89,19.51 v49.89,25.91 | v45.77,7.01 45.77,6.1 47.9,3.96 v47.9,3.05 | v41.5,2.29 v44.86,2.29 | v15.6,5.64 15.6,5.94 11.48,10.06 11.48,14.94 11.94,15.39 12.24,15.39 12.7,14.94 v12.7,13.56
N$51  (via drill 0.3)
  Top 0.152: v41.66,32.46 42.57,33.38 45.77,33.38 47.3,31.85 LEFT.OUT06 | v38.61,28.04 38.61,26.98 36.78,25.15 36.78,24.38 35.41,23.01 35.26,23.01 34.8,22.56 34.8,22.25 35.71,21.34 36.63,21.34 37.54,20.42 37.54,19.66 v35.1,17.22 | v25.5,13.26 23.22,13.26 22.15,14.33 v20.47,14.33 | v15.44,14.33 15.14,14.33 14.07,15.39 v7.67,15.39 | v6.3,14.02 4.62,12.34 4.47,12.34 3.86,11.74 3.86,7.93 v4.01,7.77
  Bottom 0.152: v41.66,32.46 41.66,31.09 v38.61,28.04 | v35.1,17.22 35.1,15.39 33.73,14.02 33.27,14.02 32.51,13.26 v25.5,13.26 | v15.44,14.33 v20.47,14.33 | v6.3,14.02 v7.67,15.39 | v4.01,7.77 3.56,7.77 2.49,8.84 _.6
N$52  (via drill 0.3)
  Top 0.152: v34.8,19.05 v36.47,20.73 | v23.22,17.68 21.54,19.36 16.66,19.36 15.14,20.88 10.72,20.88 v6.3,16.46
  Bottom 0.152: v36.47,20.73 39.37,23.62 39.37,25.15 45.31,31.09 45.31,31.85 LEFT.OUT07 | v34.8,19.05 32.97,17.22 23.67,17.22 v23.22,17.68 | v6.3,16.46 4.78,14.94 4.62,14.94 3.4,13.72 3.4,13.56 2.18,12.34 2.03,12.34 1.42,11.74 1.42,10.97 2.03,10.36 3.86,10.36 4.78,11.28 _.7
N$53  (via drill 0.3)
  Top 0.152: v47.45,27.28 LEFT.OUT08 | v51.71,21.34 51.71,13.26 54.46,10.52 54.46,8.84 56.13,7.16 60.1,7.16 60.86,6.4 60.86,4.88 60.55,4.57 57.51,4.57 57.35,4.72 54,4.72 53.09,3.81 53.09,3.2 50.95,1.07 16.05,1.07 v15.14,1.98
  Bottom 0.152: v47.45,27.28 51.71,27.28 52.02,26.98 52.02,21.64 v51.71,21.34 | v15.14,1.98 7.98,1.98 4.62,5.33 4.47,5.33 3.86,5.94 3.86,6.55 5.23,7.93 5.39,7.93 6.3,8.84 6.3,11.28 5.23,12.34 3.4,12.34 2.49,11.43 _.8
N$54  (via drill 0.3)
  Top 0.152: v42.72,23.01 42.57,23.17 42.57,24.99 40.44,27.13 40.44,31.85 LEFT.OUT09 | v23.06,7.62 16.66,7.62 14.99,5.94 v14.99,3.2
  Bottom 0.152: v42.72,23.01 42.72,13.26 39.22,9.75 39.22,8.53 38.61,7.93 37.24,7.93 36.02,9.14 30.99,9.14 29.46,7.62 v23.06,7.62 | v14.99,3.2 14.99,3.51 4.93,13.56 4.93,13.87 _.9
N$55  (via drill 0.3)
  Top 0.152: v29.16,35.97 v32.97,35.97 | v7.37,35.51 v11.94,35.51
  Bottom 0.152: v32.97,35.97 37.08,31.85 LEFT.OUT10 | v29.16,35.97 28.55,36.58 20.47,36.58 19.86,35.97 17.27,35.97 16.82,35.51 v11.94,35.51 | v7.37,35.51 4.78,35.51 3.71,34.44 3.71,26.67 2.03,24.99 1.88,24.99 1.12,24.23 1.12,15.24 2.34,14.02 _.10
N$56  (via drill 0.3)
  Top 0.152: v35.26,26.67 35.26,26.37 35.41,26.21 35.41,25.91 33.43,23.93 31.75,23.93 30.07,22.25 23.83,22.25 23.52,22.56 22.91,22.56 v22.3,21.95 | v14.53,14.17 7.21,14.17 4.93,16.46 _.11
  Bottom 0.152: v35.26,26.67 LEFT.OUT11 | v14.53,14.17 v22.3,21.95
N$57  (via drill 0.3)
  Top 0.152: v31.6,25.45 32.66,26.52 32.66,31.85 LEFT.OUT12 | v35.56,10.67 v38.15,13.26 | v25.5,10.06 23.98,10.06 23.37,9.45 11.79,9.45 11.33,9.91 10.72,9.91 6.15,5.33 6.15,3.66 5.23,2.74 4.62,2.74 3.4,3.96 3.4,15.55 2.49,16.46 _.12
  Bottom 0.152: v31.6,25.45 31.6,24.84 36.32,20.12 36.32,18.44 37.24,17.53 37.24,14.17 v38.15,13.26 | v35.56,10.67 30.68,10.67 30.07,10.06 v25.5,10.06
N$58  (via drill 0.3)
  Top 0.152: v23.98,30.02 23.67,30.02 21.69,28.04 21.23,28.04 v20.17,26.98 | v23.67,23.47 26.26,23.47 26.57,23.77 v28.55,23.77 | v21.08,19.96 16.51,19.96 15.29,21.18 v7.06,21.18
  Bottom 0.152: v23.98,30.02 27.64,30.02 29.46,31.85 LEFT.OUT13 | v23.67,23.47 v20.17,26.98 | v28.55,23.77 28.55,23.17 30.84,20.88 30.84,20.57 30.38,20.12 21.23,20.12 v21.08,19.96 | v7.06,21.18 4.93,19.05 _.13
N$59  (via drill 0.3)
  Top 0.152: v23.83,31.24 23.83,32.46 22.91,33.38 17.12,33.38 15.29,31.55 v15.29,31.39 | v12.09,30.48 10.11,30.48 9.96,30.63 8.28,30.63 6.15,28.5 6.15,23.93 4.78,22.56 4.62,22.56 3.4,21.34 3.4,19.96 2.49,19.05 _.14
  Bottom 0.152: LEFT.OUT14 27.03,31.85 25.5,30.33 24.74,30.33 v23.83,31.24 | v15.29,31.39 13.01,31.39 v12.09,30.48
N$60  (via drill 0.3)
  Top 0.152: v22.3,34.6 25.04,31.85 LEFT.OUT15 | v11.48,29.87 10.26,29.87 9.8,30.33 8.43,30.33 6.45,28.35 6.45,23.17 4.93,21.64 _.15
  Bottom 0.152: v22.3,34.6 16.05,34.6 14.68,33.22 12.24,33.22 11.48,32.46 v11.48,29.87
N$61  (via drill 0.3)
  Top 0.152: v18.49,29.11 22.3,29.11 22.76,29.57 22.76,29.87 22.61,30.02 22.61,31.85 LEFT.OUT16 | v12.09,27.74 12.09,25.91 v11.33,25.15
  Bottom 0.152: v18.49,29.11 17.12,27.74 v12.09,27.74 | v11.33,25.15 9.04,25.15 7.98,24.08 7.98,23.62 6.91,22.56 3.4,22.56 2.49,21.64 _.16
N$62  (via drill 0.3)
  Top 0.152: v22.15,29.72 LEFT.OUT17 | v27.64,24.99 22.15,24.99 18.95,21.79 v6.6,21.79
  Bottom 0.152: v22.15,29.72 23.52,29.72 25.35,27.89 25.35,26.37 26.72,24.99 v27.64,24.99 | v6.6,21.79 5.39,20.57 2.03,20.57 1.42,21.18 1.42,21.95 2.64,23.17 3.86,23.17 4.78,24.08 _.17
N$63  (via drill 0.3)
  Top 0.152: v11.18,47.55 12.4,48.77 15.29,48.77 16.97,47.09 LEFT.OUT18 | v5.84,47.85 4.47,47.85 3.4,46.79 3.4,46.48 2.34,45.42 2.03,45.42 0.51,43.89 0.51,25.91 2.34,24.08 _.18
  Bottom 0.152: v11.18,47.55 10.41,47.55 10.11,47.24 6.45,47.24 v5.84,47.85
N$64  (via drill 0.3)
  Top 0.152: v16.51,45.72 16.51,44.2 15.14,42.82 12.4,42.82 9.5,39.93 6.91,39.93 4.78,37.8 2.03,37.8 1.42,37.19 1.42,36.42 2.64,35.2 2.79,35.2 3.4,34.6 3.4,31.39 2.18,30.18 2.03,30.18 1.42,29.57 1.42,28.8 2.64,27.58 3.86,27.58 4.78,26.67 _.19
  Bottom 0.152: LEFT.OUT19 19.41,47.09 17.88,45.57 16.66,45.57 v16.51,45.72
N$65  (via drill 0.3)
  Top 0.152: v1.73,43.13 4.93,43.13 6.45,44.65 6.45,48.01 11.48,53.04 22.3,53.04 22.91,52.43 22.91,51.51 22.61,51.21 22.61,47.09 LEFT.OUT20
  Bottom 0.152: v1.73,43.13 1.73,42.52 1.42,42.22 1.42,40.69 1.73,40.39 1.73,40.08 1.42,39.78 1.42,27.58 2.34,26.67 _.20
N$66
  Top 0.152: LEFT.OUT21 25.2,47.09 25.2,41.76 25.35,41.61 25.35,39.78 22.91,37.34 18.64,37.34 16.36,35.05 14.53,35.05 13.46,33.99 13.46,32 12.85,31.39 10.26,31.39 9.65,32 9.65,32.61 9.04,33.22 8.43,33.22 4.93,29.72 4.93,29.26 _.21
N$67  (via drill 0.3)
  Top 0.152: v34.8,44.04 34.8,37.95 36.78,35.97 36.78,29.11 v34.34,26.67 | v33.12,25.45 32.82,25.45 29.92,22.56 23.98,22.56 23.67,22.86 v22.3,22.86 | v18.64,22.86 15.29,22.86 14.68,22.25 8.89,22.25 v7.37,23.77 | v5.54,27.89 3.71,27.89 2.49,29.11 _.22
  Bottom 0.152: LEFT.OUT22 30.68,44.04 v34.8,44.04 | v33.12,25.45 v34.34,26.67 | v18.64,22.86 v22.3,22.86 | v7.37,23.77 7.37,26.06 v5.54,27.89
N$68  (via drill 0.3)
  Top 0.152: v27.18,35.66 27.18,44.2 30.07,47.09 LEFT.OUT23 | v11.33,33.38 9.35,33.38 9.2,33.53 6.76,33.53 4.93,31.7 _.23
  Bottom 0.152: v27.18,35.66 17.42,35.66 16.66,34.9 15.9,34.9 14.53,33.53 11.48,33.53 v11.33,33.38
N$69  (via drill 0.3)
  Top 0.152: v32.66,44.65 32.66,47.09 LEFT.OUT24 | v30.84,44.65 30.84,40.23 v28.55,37.95 | v20.02,39.47 v20.78,38.71 | v17.27,39.47 15.44,41.3 11.33,41.3 9.65,39.62 8.28,39.62 v7.21,38.56
  Bottom 0.152: v30.84,44.65 v32.66,44.65 | v28.55,37.95 28.25,37.95 27.94,37.64 21.84,37.64 v20.78,38.71 | v17.27,39.47 v20.02,39.47 | v7.21,38.56 7.21,37.8 5.23,35.81 4.62,35.81 3.4,34.6 3.4,32.61 2.49,31.7 _.24
N$70  (via drill 0.3)
  Top 0.152: LEFT.OUT25 35.26,46.48 34.19,45.42 v34.19,38.86 | v27.33,27.13 25.81,25.6 19.1,25.6 v18.34,24.84
  Bottom 0.152: v34.19,38.86 34.19,38.1 31.14,35.05 31.14,29.72 28.55,27.13 v27.33,27.13 | v18.34,24.84 17.73,24.84 17.42,25.15 14.99,25.15 14.68,25.45 13.77,25.45 12.09,27.13 10.26,27.13 9.35,28.04 7.98,28.04 5.84,30.18 5.84,33.22 4.93,34.14 _.25
N$71  (via drill 0.3)
  Top 0.152: v1.12,45.26 1.12,47.09 2.18,48.16 5.08,48.16 10.26,53.34 29.62,53.34 32.51,50.44 34.34,50.44 37.69,47.09 LEFT.OUT26 | v1.12,40.23 1.12,35.51 2.34,34.29 _.26
  Bottom 0.152: v1.12,40.23 v1.12,45.26
N$72  (via drill 0.3)
  Top 0.152: v37.08,43.43 40.28,46.63 40.28,47.09 LEFT.OUT27 | v16.66,36.88 v20.47,40.69
  Bottom 0.152: v37.08,43.43 29.16,43.43 28.85,43.13 22.76,43.13 21.08,41.45 21.08,41.3 v20.47,40.69 | v16.66,36.88 15.29,36.88 14.83,36.42 12.24,36.42 11.63,37.03 11.63,39.62 9.8,41.45 8.74,41.45 6.6,39.32 6.6,37.64 5.84,36.88 4.93,36.88 _.27
N$73  (via drill 0.3)
  Top 0.152: LEFT.OUT28 43.49,47.09 45.01,48.62 45.77,48.62 46.38,48.01 46.38,46.18 v41.81,41.61 | v21.08,42.82 v22.61,41.3 | v18.95,40.69 18.95,40.39 12.55,33.99 6.45,33.99 4.62,35.81 3.4,35.81 2.49,36.73 _.28
  Bottom 0.152: v41.81,41.61 24.28,41.61 23.98,41.3 v22.61,41.3 | v18.95,40.69 v21.08,42.82
N$74  (via drill 0.3)
  Top 0.152: v41.05,42.82 45.31,47.09 LEFT.OUT29
  Bottom 0.152: v41.05,42.82 36.17,42.82 35.87,43.13 29.31,43.13 29.01,42.82 22.91,42.82 21.39,41.3 21.39,40.84 20.63,40.08 11.63,40.08 9.96,41.76 7.67,41.76 5.23,39.32 _.29
N$75  (via drill 0.3)
  Top 0.152: v45.62,49.38 47.9,47.09 LEFT.OUT30 | v9.96,47.85 9.96,47.55 8.59,46.18 8.59,44.81 5.84,42.06 5.84,41.45 4.62,40.23 3.4,40.23 2.49,39.32 _.30
  Bottom 0.152: v45.62,49.38 39.37,49.38 39.22,49.23 11.33,49.23 v9.96,47.85
N$76  (via drill 0.3)
  Top 0.152: LEFT.OUT31 49.89,47.09 43.79,41 v38.76,41 | v22.3,40.39 20.63,42.06 19.71,42.06 19.41,41.76 15.44,41.76 v14.99,42.22
  Bottom 0.152: v38.76,41 36.47,41 35.1,39.62 29.31,39.62 28.55,40.39 v22.3,40.39 | v14.99,42.22 14.68,42.22 13.46,43.43 13.46,44.04 12.7,44.81 10.11,44.81 9.2,45.72 7.82,45.72 4.78,42.67 4.78,41.91 _.31
N$77  (via drill 0.3)
  Top 0.152: v48.06,42.22 52.93,47.09 LEFT.OUT32 | v19.56,38.25 18.8,38.25 v16.66,36.12 | v11.33,36.12 7.67,36.12 v5.99,37.8
  Bottom 0.152: v48.06,42.22 36.32,42.22 35.71,42.82 31.9,42.82 31.6,42.52 23.06,42.52 21.69,41.15 21.69,40.39 v19.56,38.25 | v11.33,36.12 v16.66,36.12 | v5.99,37.8 5.08,37.8 3.4,39.47 3.4,40.84 2.49,41.76 _.32
N$78  (via drill 0.3)
  Top 0.152: v32.06,41 33.58,42.52 33.58,47.24 34.95,48.62 35.56,48.62 36.17,48.01 36.17,42.82 39.22,39.78 48.36,39.78 52.48,43.89 52.48,44.04 55.52,47.09 LEFT.OUT33 | v24.44,41 23.67,41 20.47,44.2 v19.41,44.2 | v15.75,44.2 15.29,44.2 14.38,45.11 10.87,45.11 v10.57,45.42
  Bottom 0.152: v24.44,41 v32.06,41 | v15.75,44.2 v19.41,44.2 | v10.57,45.42 9.96,46.03 6.45,46.03 4.93,44.5 _.33
N$79  (via drill 0.3)
  Top 0.152: LEFT.OUT34 57.51,47.09 55.98,48.62 51.56,48.62 v50.19,49.99
  Bottom 0.152: v50.19,49.99 39.52,49.99 39.07,49.53 8.74,49.53 7.67,48.46 4.47,48.46 3.4,49.53 3.4,49.84 2.79,50.44 1.88,50.44 1.27,49.84 1.27,45.87 2.34,44.81 2.34,44.5 _.34
N$80  (via drill 0.3)
  Top 0.152: v24.89,14.48 24.89,15.85 26.26,17.22 26.57,17.22 CPU.2 | U$3.4 27.03,3.81 24.28,6.55 U$1.IN4
  Bottom 0.152: v24.89,14.48 24.89,12.5 22.45,10.06 22.45,7.47 23.37,6.55 24.13,6.55 U$1.IN4
N$81
  Top 0.152: 26.26,7.16 26.26,6.55 U$1.IN5 | 26.26,7.16 26.26,8.23 27.18,9.14 27.18,13.56 CPU.9 | 26.26,7.16 U$3.5
N$82
  Top 0.152: 27.33,7.47 27.33,7.16 27.94,6.55 U$1.IN6 | 27.33,7.47 27.33,8.84 27.79,9.3 27.79,13.56 CPU.10 | 27.33,7.47 30.99,3.81 32.21,3.81 U$3.6
N$83
  Top 0.152: 29.92,7.32 29.92,6.55 U$1.IN7 | 29.92,7.32 29.92,7.62 28.25,9.3 28.25,13.56 CPU.11 | 29.92,7.32 33.43,3.81 34.65,3.81 U$3.7
N$84
  Top 0.152: CPU.12 28.85,13.56 28.85,9.45 31.75,6.55 U$1.IN8
  Bottom 0.152: U$3.8 39.07,3.81 36.02,3.81 34.19,5.64 32.66,5.64 31.9,6.4 U$1.IN8
N$85
  Top 0.152: CPU.13 29.31,13.56 29.31,12.04 32.82,8.53 32.82,7.47 33.73,6.55 U$1.IN9
  Bottom 0.152: U$3.9 41.66,3.81 40.44,3.81 39.52,4.72 36.47,4.72 36.17,4.42 35.87,4.42 33.88,6.4 U$1.IN9
N$86  (via drill 0.3)
  Top 0.152: v33.43,8.08 33.43,8.38 29.77,12.04 29.77,13.56 CPU.14
  Bottom 0.152: v33.43,8.08 34.34,7.16 34.8,7.16 35.26,7.62 36.63,7.62 36.93,7.32 37.85,7.32 38.46,6.71 38.46,6.25 37.85,5.64 | 37.85,5.64 36.47,5.64 35.71,6.4 U$1.IN10 | 37.85,5.64 41.2,5.64 43.03,3.81 44.25,3.81 U$3.10
N$90  (via drill 0.3)
  Top 0.152: v61.47,34.6 65.43,34.6 68.94,38.1 BRIGHT.3
  Bottom 0.152: v61.47,34.6 59.79,32.92 59.79,31.7 54.92,26.82 54.92,23.77 50.04,18.9 49.73,18.9 42.27,11.43 42.27,8.99 40.89,7.62 37.08,7.62 36.32,8.38 U$1.OUT3
N$91  (via drill 0.3)
  Top 0.152: v51.87,5.03 51.26,5.03 50.04,6.25 R2.2 | v60.86,4.12 62.08,5.33 D2.A
  Bottom 0.152: v51.87,5.03 54.15,2.74 59.49,2.74 v60.86,4.12
N$92
  Top 0.152: VADJ2.2 72.75,45.11 70.92,45.11 68.63,47.4 VADJ1.2
  Bottom 0.152: LEDVREG.1 70.61,53.8 70.61,51.05 68.63,49.07 68.63,47.55 VADJ1.2
N$93
  Bottom 0.152: _.35 11.35,46.94 13.23,48.82 58.93,48.82 LEFT.OUT35
N$94  (via drill 0.3)
  Top 0.152: 20.47,16 20.93,16 23.06,13.87 25.04,13.87 25.81,14.63 26.57,14.63 CPU.7 | 20.47,16 19.41,17.07 Q1.3 | v23.98,18.29 25.81,20.12 25.81,21.34 25.65,21.49 23.98,21.49 23.22,20.73 C9.1 | v20.47,15.85 20.47,16
  Bottom 0.152: v23.98,18.29 22.91,18.29 v20.47,15.85
N$95  (via drill 0.3)
  Top 0.152: 24.89,11.89 22.45,11.89 21.69,12.65 Q1.1 | 24.89,11.89 25.81,11.89 26.57,12.65 26.57,14.17 CPU.8 | v23.52,10.36 21.54,10.36 C8.1 | v24.89,11.74 24.89,11.89
  Bottom 0.152: v23.52,10.36 v24.89,11.74
N$97  (via drill 0.3)
  Top 0.152: v32.66,18.14 31.75,17.22 31.45,17.22 CPU.23 | v36.17,24.54 v32.66,21.03 | v36.17,30.33 36.17,36.12 31.45,40.84 31.45,50.29 29.77,51.97 U$3.A_0 | v26.72,23.17 30.07,23.17 32.97,26.06 v34.8,26.06
  Bottom 0.152: v32.66,21.03 v32.66,18.14 | 36.17,26.06 v36.17,30.33 | 36.17,26.06 v36.17,24.54 | v26.72,23.17 19.1,30.79 19.1,32.16 17.88,33.38 17.12,33.38 16.21,32.46 14.53,32.46 VD0.2 | v34.8,26.06 36.17,26.06
N$98  (via drill 0.3)
  Top 0.152: v31.45,19.96 31.45,17.83 CPU.24 | v29.92,23.77 29.92,25.45 30.99,26.52 30.99,29.11 28.55,31.55 28.55,35.05 27.64,35.97 27.64,44.2 29.01,45.57 30.53,45.57 | 30.53,45.57 31.14,46.18 31.14,48.01 U$3.A_1 | VD1.2 12.55,33.53 v20.47,41.45 | v28.7,43.74 30.53,45.57
  Bottom 0.152: v31.45,19.96 31.45,22.25 v29.92,23.77 | v20.47,41.45 22.76,43.74 v28.7,43.74
N$99  (via drill 0.3)
  Top 0.152: v27.33,21.34 30.38,21.34 30.84,20.88 30.84,18.44 CPU.25 | v21.54,27.43 22.61,27.43 25.96,30.79 25.96,32.92 26.26,33.22 26.26,47.85 24.59,49.53 U$3.A_2
  Bottom 0.152: v27.33,21.34 22.45,26.21 22.15,26.21 21.23,27.13 | 21.23,27.13 19.41,28.96 19.41,29.41 18.49,30.33 16.51,30.33 15.6,29.41 15.6,28.65 14.99,28.04 12.55,28.04 10.72,29.87 10.72,32.31 VD2.2 | 21.23,27.13 v21.54,27.43
N$100  (via drill 0.3)
  Top 0.152: v30.23,20.73 30.23,18.44 CPU.26 | v20.63,30.02 17.73,30.02 17.42,30.33 15.44,30.33 14.68,31.09 9.96,31.09 8.74,32.31 VD3.2 | v24.44,39.62 25.04,40.23 25.04,41.45 21.69,44.81 21.69,48.16 22,48.46 22,51.97 U$3.A_3
  Bottom 0.152: v30.23,20.73 29.92,20.73 20.93,29.72 | v20.63,30.02 20.93,29.72 | v24.44,39.62 28.85,39.62 30.84,37.64 30.84,34.75 29.77,33.68 22.45,33.68 20.93,32.16 20.93,29.72
N$101  (via drill 0.3)
  Top 0.152: v28.85,20.73 29.77,19.81 29.77,18.44 CPU.27 | v22.3,26.82 23.67,26.82 26.72,29.87 26.72,32.77 27.33,33.38 v27.33,34.9 | v28.4,35.97 28.4,37.34 27.94,37.8 27.94,43.74 v28.7,44.5 | v18.8,42.98 18.8,47.7 19.41,48.31 19.41,51.97 U$3.A_4
  Bottom 0.152: v28.85,20.73 27.03,22.56 26.57,22.56 v22.3,26.82 | v27.33,34.9 v28.4,35.97 | v28.7,44.5 20.93,44.5 19.41,42.98 v18.8,42.98 15.29,42.98 14.53,43.74 VD4.2
N$102  (via drill 0.3)
  Top 0.152: v28.09,20.73 29.31,19.51 29.31,18.44 CPU.28 | v18.34,28.04 16.51,28.04 15.6,28.96 15.6,29.72 14.99,30.33 12.85,30.33 v11.18,28.65 | v9.04,34.6 7.52,34.6 6.76,35.36 v6.76,36.27 | v8.89,40.84 8.89,42.67 9.8,43.59 9.8,44.2 10.26,44.65 11.63,44.65 VD5.2 | v19.25,42.37 18.64,42.37 18.19,42.82 18.19,43.13 18.34,43.28 18.34,48.16 16.97,49.53 U$3.A_5
  Bottom 0.152: v28.09,20.73 25.65,20.73 v18.34,28.04 | v11.18,28.65 11.18,28.96 9.65,30.48 9.65,33.99 v9.04,34.6 | v6.76,36.27 7.82,37.34 7.82,39.78 v8.89,40.84 | v19.25,42.37 17.58,42.37 16.51,41.3 15.14,41.3 12.7,43.74 VD5.2
N$105  (via drill 0.3)
  Top 0.152: v34.04,15.55 33.88,15.7 31.45,15.7 CPU.20 | v38.91,11.74 43.03,11.74 v44.7,10.06
  Bottom 0.152: v34.04,15.55 34.04,16.76 33.73,17.07 33.73,17.37 34.19,17.83 36.47,17.83 36.93,17.37 36.93,13.72 v38.91,11.74 | v44.7,10.06 44.7,8.84 47.9,5.64 53.39,5.64 54.31,4.72 55.98,4.72 56.9,3.81 U$3.AREF
PWR5PRESEL  (via drill 0.3)
  Top 0.305: v65.89,1.68 66.8,2.59 68.63,2.59 C5.1 | v14.99,1.07 11.63,4.42 5V.2 11.63,4.57 11.02,5.18 v11.02,9.3 | v10.57,23.17 10.57,26.98 9.5,28.04 9.5,29.11 SRC5V.1
  Bottom 0.305: v65.89,1.68 61.16,1.68 60.4,0.91 15.14,0.91 v14.99,1.07 | v10.57,23.17 10.57,15.39 11.02,14.94 v11.02,9.3
PWRNET  (via drill 0.3)
  Top 0.305: C4.1 11.33,12.8 10.41,12.8 9.35,11.74 5V.3 9.2,11.58 7.37,11.58 v5.69,9.91 | 35.64,51.44 35.1,50.9 34.34,50.9 30.84,54.41 30.84,55.47 30.68,55.63 8.43,55.63 4.93,52.12 _.39 | 35.64,51.44 35.87,51.66 35.87,52.12 37.39,53.65 37.39,54.41 VINPASS.2 | v39.07,46.33 39.07,48.01 35.64,51.44
  Bottom 0.305: 75.95,50.9 75.95,53.65 75.79,53.8 LEDVREG.3 | 75.95,50.9 75.95,50.14 C1.1 | 88.9,50.9 75.95,50.9 | 88.9,50.9 91.03,50.9 92.1,51.97 93.17,51.97 __.39 | 83.72,43.13 83.72,45.72 88.9,50.9 | 83.72,43.13 83.72,42.52 JACK.1 83.72,43.13 | v5.69,9.91 1.73,9.91 0.36,11.28 0.36,51.51 2.03,53.19 3.71,53.19 4.78,52.12 _.39 | 83.72,43.13 76.71,43.13 75.64,44.2 60.86,44.2 59.64,45.42 39.98,45.42 v39.07,46.33
RST  (via drill 0.3)
  Top 0.152: 28.7,19.2 28.7,18.44 CPU.29 | 28.7,19.2 v26.57,21.34 | 53.7,50.44 53.85,50.29 S1.3 53.7,50.44 | 53.7,50.44 52.63,51.51 52.63,52.58 R1.2 52.48,52.73 51.71,53.49 50.19,53.49 48.82,52.12 47.45,52.12 U$3.RESET | v64.67,10.97 64.67,9.3 68.33,5.64 68.63,5.64 C6.2 | 60.1,49.99 60.4,50.29 S1.4 60.1,49.99 | 60.1,49.99 59.79,49.68 59.79,46.03 59.94,45.87 v59.94,44.04 51.26,35.36 v41.96,35.36 | 53.7,50.44 55.98,52.73 57.35,52.73 60.1,49.99 | 28.7,19.2 v28.7,19.36 | v30.84,22.1 32.97,22.1 v36.93,26.06
  Bottom 0.152: v26.57,21.34 19.1,28.8 19.1,29.26 18.64,29.72 17.42,29.72 16.97,29.26 ICSP.5 | v64.67,10.97 62.08,13.56 62.08,41.91 v59.94,44.04 | v28.7,19.36 30.07,19.36 31.14,20.42 31.14,21.79 v30.84,22.1 | v36.93,26.06 36.93,29.11 39.37,31.55 39.37,32.77 v41.96,35.36
RTS#
  Top 0.152: C6.1 70.61,5.49 83.87,5.49 85.55,3.81 FTDI.6
RXD  (via drill 0.3)
  Top 0.152: v23.06,16.15 26.26,19.36 27.64,19.36 28.25,18.75 28.25,18.44 CPU.30 | 16.97,6.1 16.66,6.4 U$1.IN0 16.97,6.1 | U$3.0_RX 16.97,6.1 | v78.99,6.25 70.16,6.25 67.26,9.14 67.26,11.13 65.13,13.26 v57.66,13.26 | v46.84,13.26 43.64,13.26 v39.98,16.92 | v38.15,16.92 36.63,16.92 v36.32,17.22 | v23.06,8.38 23.67,7.77 23.67,7.47 23.22,7.01 22.91,7.01 22.61,7.32 18.19,7.32 16.97,6.1
  Bottom 0.152: v23.06,16.15 16.66,9.75 16.66,6.55 U$1.IN0 | v78.99,6.25 80.37,4.88 80.37,3.81 FTDI.4 | v46.84,13.26 v57.66,13.26 | v38.15,16.92 v39.98,16.92 | v36.32,17.22 36.32,15.7 31.75,11.13 31.45,11.13 30.99,11.58 30.99,12.34 30.53,12.8 27.48,12.8 v23.06,8.38
SCK  (via drill 0.3)
  Top 0.152: R3.1 56.44,6.4 56.13,6.4 55.37,7.16 54,7.16 52.63,5.79 52.63,4.42 52.02,3.81 U$3.13 51.87,3.81 50.95,3.81 48.36,6.4 41.96,6.4 | 41.96,6.4 41.5,6.4 U$1.IN13 | v32.36,13.87 32.06,14.17 31.45,14.17 CPU.17 | v23.37,21.95 30.23,21.95 34.34,17.83 v34.34,17.22 v36.93,19.81 | 41.96,6.4 41.96,10.36 41.2,11.13 38.76,11.13 38.3,11.58 38.3,12.19 v38.76,12.65
  Bottom 0.152: v32.36,13.87 32.66,13.87 33.27,14.48 33.73,14.48 34.65,15.39 34.65,16.92 v34.34,17.22 | v23.37,21.95 23.37,22.56 19.41,26.52 16.97,26.52 ICSP.3 | v38.76,12.65 38.76,14.78 37.54,16 37.54,19.2 v36.93,19.81
TXD  (via drill 0.3)
  Top 0.152: v22.76,15.09 26.72,19.05 27.33,19.05 27.79,18.59 27.79,18.44 CPU.31 | U$1.IN1 18.64,6.4 19.41,5.64 19.41,3.81 U$3.1_TX 19.56,3.66 20.32,2.9 39.68,2.9 40.13,3.35 40.13,3.51 41.35,4.72 v42.88,4.72 | v54.76,15.09 54.76,8.99 55.83,7.93 63.75,7.93 66.95,4.72 71.07,4.72 71.22,4.88 80.82,4.88 81.89,3.81 82.96,3.81 FTDI.5
  Bottom 0.152: v22.76,15.09 22.76,12.5 18.64,8.38 18.64,6.55 U$1.IN1 | v54.76,15.09 46.99,15.09 42.57,10.67 42.57,5.03 v42.88,4.72
USB_5V
  Bottom 0.305: SRC5V.3 9.5,24.08 9.5,9.75 17.73,1.52 60.25,1.52 64.52,5.79 69.24,5.79 72.44,2.59 76.86,2.59 77.93,3.66 FTDI.3
USRPWR  (via drill 0.3)
  Top 0.305: v14.99,40.69 v16.36,39.32 | v30.23,37.19 v34.19,37.19 | v58.12,37.19 60.1,37.19 64.52,41.61 66.8,41.61 | 66.8,41.61 78.69,41.61 84.02,46.94 __.36 | v65.28,48.92 65.89,48.92 66.8,48.01 66.8,41.61
  Bottom 0.305: v14.99,40.69 13.46,42.22 7.37,42.22 5.84,40.69 4.47,40.69 3.86,41.3 3.86,44.5 2.49,45.87 2.49,46.94 _.36 | v16.36,39.32 18.19,37.49 21.23,37.49 21.54,37.19 v30.23,37.19 | v34.19,37.19 v58.12,37.19 | v65.28,48.92 60.86,53.34 53.09,53.34 51.87,54.56 45.01,54.56 IDEVSEL.3

## Text on the board
bPlace: 1
tNames: Lightuino V2.0 Andrew Stone Aug 2009 | http://code.google.com/p/arduino-m5451-current-driver/ | PIN_SELECT | Left | Clock | Right | Bright
tValues: BLK | GRN